# Altium PCB AT89S52多功能板.PcbDoc (part 5 of 5)
Units mm, origin at the board's own origin, x right, y up, seen from the top; angles counter-clockwise.
Board outline 152.4 x 101.6 mm, 2 copper layers (Top Layer, Bottom Layer); 140 components, 143 nets, 570 pads, 50 vias.
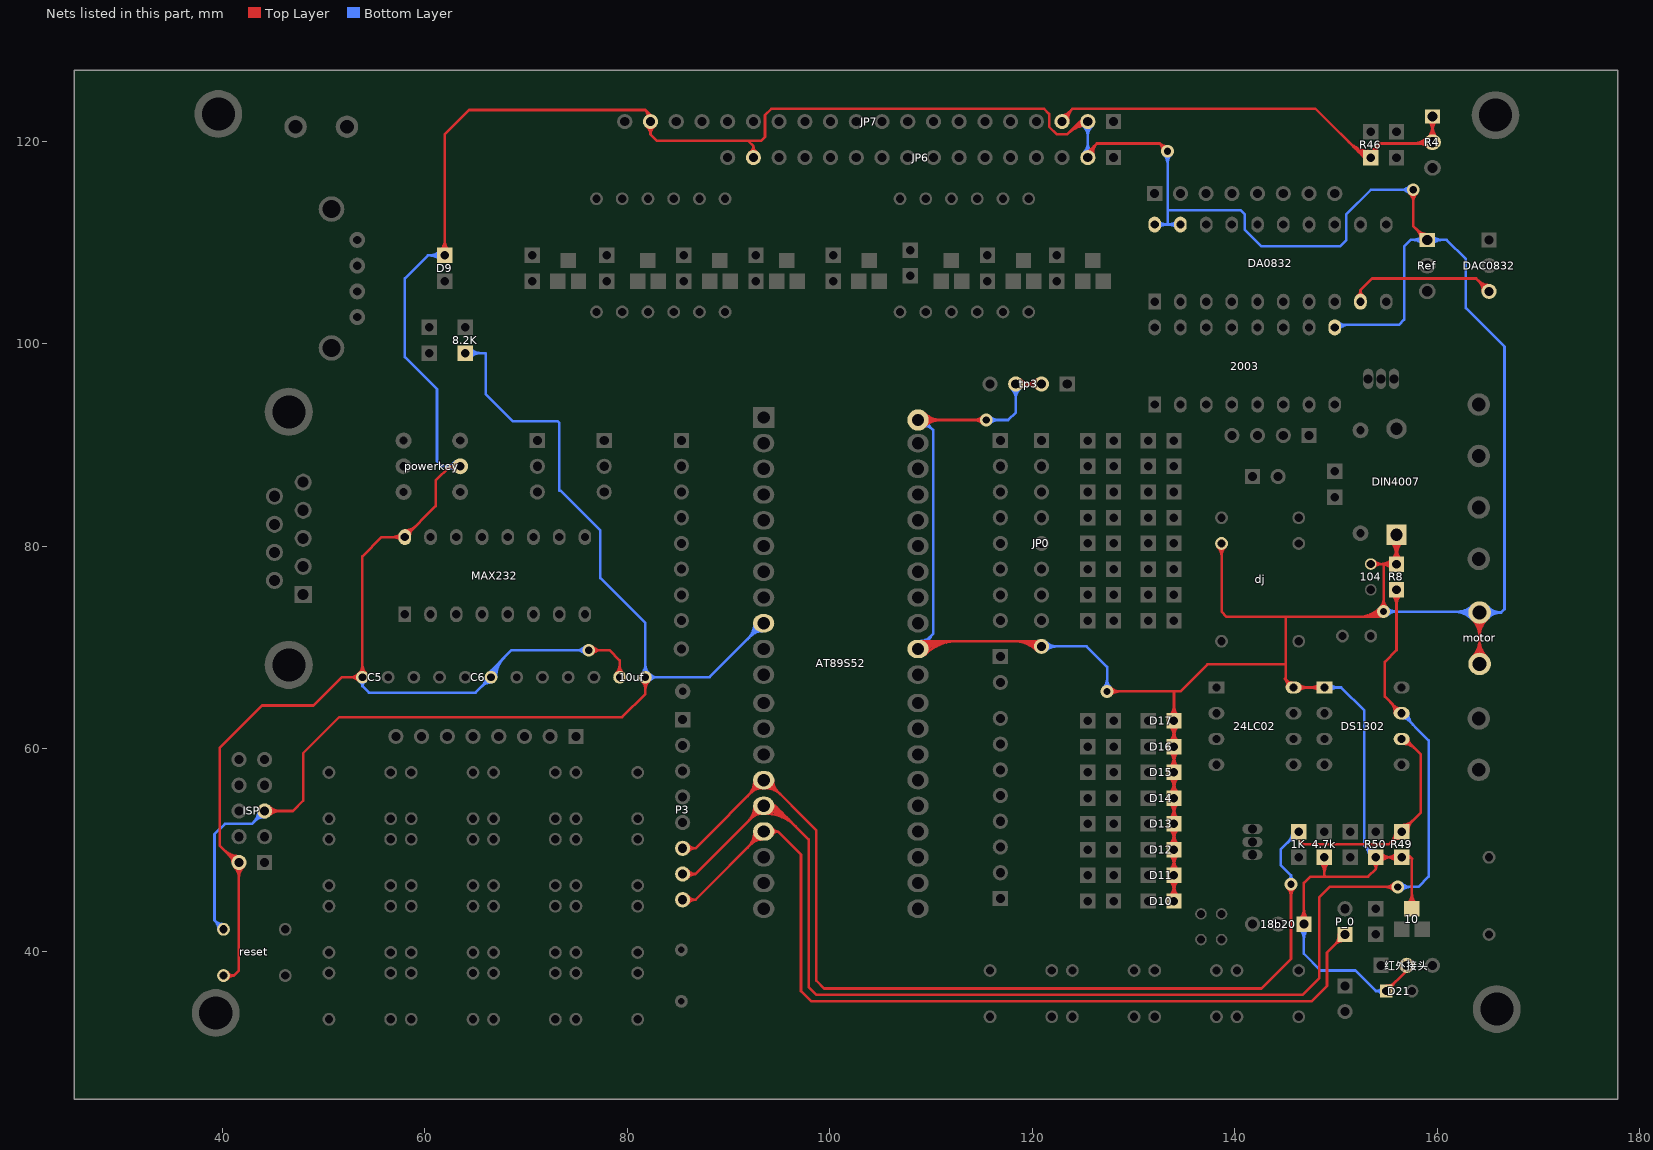
[diagram p5: the nets of this part, all layers, seen from the top]

## Via types
v1: diameter 1.27, hole 0.711, Top Layer to Bottom Layer, 50 vias

## Nets (pads, with @x,y where several pads share a name; then routed paths per layer and width w, separated by ;. In a path a pad name is that pad's centre, name@x,y a point inside that pad or via, vN(x,y) a via of type N, cw(c..) or ccw(c..) an arc to the next point about the centre after c; other vN are vias at no path point) (continued)
P35: 1K.1 AT89S52.15 DS1302.6 P3.6 R49.1 | length 149.4
  Top Layer w0.254: P3.6@85.471,50.165 86.741,50.165 ; P3.6@85.763,49.939 cw(c86.223,49.583) 86.223,50.165 cw(c86.223,50.747) P3.6@85.763,50.391 ; P3.6@85.964,49.784 cw(c86.741,49.182) 86.741,50.165 ; P3.6@85.964,50.546 ccw(c86.741,51.148) 86.741,50.165 ; 91.892,55.316 ccw(c90.312,56.896) AT89S52.15@92.547,56.896 ; 92.254,55.678 cw(c93.322,54.611) AT89S52.15@93.322,56.121 ; 92.326,55.75 ccw(c91.18,56.896) AT89S52.15@92.801,56.896 ; 92.688,56.112 cw(c93.322,55.478) AT89S52.15@93.322,56.375 ; 92.759,56.183 ccw(c92.047,56.896) AT89S52.15@93.055,56.896 ; AT89S52.15@93.622,56.121 cw(c93.622,53.998) 95.123,55.499 ; AT89S52.15@93.622,56.375 cw(c93.622,54.865) 94.69,55.932 ; AT89S52.15@94.143,56.896 ccw(c95.151,56.896) 94.439,56.183 ; AT89S52.15@94.397,56.896 ccw(c96.018,56.896) 94.872,55.75 ; v1@145.183,46.25 cw(c144.316,45.383) 145.542,45.383 cw(c146.768,45.383) v1@145.901,46.25 ; v1(145.542,46.609) 145.542,39.243 142.621,36.322 99.441,36.322 98.679,37.084 98.679,51.943 93.726,56.896 AT89S52.15@93.472,56.896 86.741,50.165 ; 1K.1@146.304,51.816 146.304,51.054 146.812,50.546 155.194,50.546 158.369,53.721 158.369,59.436 156.846,60.959 DS1302.6@156.46,60.959 ; R49.1@155.829,51.816 cw(c154.296,51.816) 155.38,50.732 cw(c156.464,49.648) R49.1@156.464,51.181 ; R49.1@156.083,51.816 cw(c155.163,51.816) 155.814,51.166 cw(c156.464,50.515) R49.1@156.464,51.435 ; R49.1@156.464,52.197 ccw(c156.464,53.117) 157.114,52.466 ccw(c157.765,51.816) R49.1@156.845,51.816 ; R49.1@156.464,52.451 ccw(c156.464,53.984) 157.548,52.9 ccw(c158.632,51.816) R49.1@157.099,51.816 ; DS1302.6@156.638,60.476 cw(c156.638,58.809) 157.817,59.988 ; DS1302.6@156.638,60.73 cw(c156.638,59.676) 157.383,60.422 ; DS1302.6@157.121,60.959 ccw(c157.783,60.959) 157.315,60.49
  Bottom Layer w0.254: v1(145.542,46.609) 145.542,47.498 ; 1K.1@145.669,51.816 cw(c144.136,51.816) 145.22,50.732 cw(c146.304,49.648) 1K.1@146.304,51.181 ; 1K.1@145.923,51.816 cw(c145.003,51.816) 145.654,51.166 cw(c146.304,50.515) 1K.1@146.304,51.435 ; 1K.1@146.304,51.816 144.526,50.038 144.526,48.514 145.542,47.498 ; 145.542,47.498 ccw(c146.066,47.498) 145.8,47.047 cw(c146.066,47.498) 145.542,47.498 ; 145.542,47.498 cw(c145.018,47.498) 145.284,47.047 ccw(c145.018,47.498) 145.542,47.498
P36: AT89S52.16 DS1302.7 P3.7 R8.1 | length 167.6
  Top Layer w0.254: P3.7@85.471,47.625 86.741,47.625 ; P3.7@85.763,47.399 cw(c86.223,47.043) 86.223,47.625 cw(c86.223,48.207) P3.7@85.763,47.851 ; P3.7@85.964,47.244 cw(c86.741,46.642) 86.741,47.625 ; P3.7@85.964,48.006 ccw(c86.741,48.608) 86.741,47.625 ; 91.892,52.776 ccw(c90.312,54.356) AT89S52.16@92.547,54.356 ; 92.254,53.138 cw(c93.322,52.071) AT89S52.16@93.322,53.581 ; 92.326,53.21 ccw(c91.18,54.356) AT89S52.16@92.801,54.356 ; 92.688,53.572 cw(c93.322,52.938) AT89S52.16@93.322,53.835 ; 92.759,53.643 ccw(c92.047,54.356) AT89S52.16@93.055,54.356 ; AT89S52.16@93.622,53.581 cw(c93.622,49.311) 96.641,52.33 ; AT89S52.16@93.622,53.835 cw(c93.622,50.179) 96.207,52.764 ; AT89S52.16@93.622,54.089 cw(c93.622,51.046) 95.774,53.197 ; AT89S52.16@93.622,54.343 cw(c93.622,51.913) 95.34,53.631 ; AT89S52.16@93.622,54.597 cw(c93.622,52.78) 94.906,54.065 ; 155.333,64.626 cw(c154.205,63.499) DS1302.7@155.8,63.499 ; R8.1@155.507,75.243 cw(c154.423,74.159) 155.956,74.159 cw(c157.489,74.159) R8.1@156.405,75.243 ; R8.1@155.687,75.423 cw(c155.036,74.772) 155.956,74.772 cw(c156.876,74.772) R8.1@156.225,75.423 ; v1@155.724,45.996 ccw(c154.857,45.129) 154.857,46.355 ccw(c154.857,47.581) v1@155.724,46.714 ; 155.762,64.197 ccw(c156.282,64.717) DS1302.7@156.282,63.982 ; 155.766,64.193 cw(c155.073,63.499) DS1302.7@156.054,63.499 ; DS1302.7@155.952,63.496 DS1302.7@155.952,63.499 ; R8.1@155.956,75.692 155.956,69.723 154.813,68.58 154.813,65.146 DS1302.7@156.46,63.499 ; v1(156.083,46.355) 149.352,46.355 148.336,45.339 148.336,37.338 146.685,35.687 98.679,35.687 97.917,36.449 97.917,51.054 94.615,54.356 ; 86.741,47.625 AT89S52.16@93.472,54.356 94.615,54.356 ; 94.615,54.356 ccw(c94.615,54.108) 94.374,54.168 cw(c94.615,54.108) 94.615,54.356 ; 94.615,54.356 cw(c94.615,54.604) 94.374,54.544 ccw(c94.615,54.604) 94.615,54.356
  Bottom Layer w0.254: v1(156.083,46.355) 158.115,46.355 159.131,47.371 159.131,60.828 DS1302.7@156.46,63.499 ; v1@156.442,45.996 cw(c157.309,45.129) 157.309,46.355 cw(c157.309,47.581) v1@156.442,46.714 ; DS1302.7@156.638,63.016 cw(c156.638,62.281) 157.158,62.801 ; DS1302.7@156.867,63.499 ccw(c157.848,63.499) 157.154,62.805 ; DS1302.7@157.121,63.499 ccw(c158.715,63.499) 157.588,62.372
P37: AT89S52.17 P3.8 P_0.1 | length 102.8
  Top Layer w0.254: P3.8@85.471,45.085 86.741,45.085 ; P3.8@85.763,44.859 cw(c86.223,44.503) 86.223,45.085 cw(c86.223,45.667) P3.8@85.763,45.311 ; P3.8@85.964,44.704 cw(c86.741,44.102) 86.741,45.085 ; P3.8@85.964,45.466 ccw(c86.741,46.068) 86.741,45.085 ; 91.892,50.236 ccw(c90.312,51.816) AT89S52.17@92.547,51.816 ; 92.254,50.598 cw(c93.322,49.531) AT89S52.17@93.322,51.041 ; 92.326,50.67 ccw(c91.18,51.816) AT89S52.17@92.801,51.816 ; 92.688,51.032 cw(c93.322,50.398) AT89S52.17@93.322,51.295 ; 92.759,51.103 ccw(c92.047,51.816) AT89S52.17@93.055,51.816 ; P_0.1@150.253,41.656 cw(c148.749,41.656) 149.812,40.592 cw(c150.876,39.529) P_0.1@150.876,41.033 ; P_0.1@150.507,41.656 cw(c149.616,41.656) 150.246,41.026 cw(c150.876,40.396) P_0.1@150.876,41.287 ; P_0.1@150.876,41.656 149.098,39.878 149.098,36.576 147.574,35.052 98.171,35.052 97.155,36.068 97.155,49.53 94.869,51.816 ; 86.741,45.085 AT89S52.17@93.472,51.816 94.869,51.816 ; 94.869,51.816 ccw(c94.869,51.201) 94.317,51.473 cw(c94.869,51.201) 94.869,51.816 ; 94.869,51.816 cw(c94.869,52.431) 94.317,52.159 ccw(c94.869,52.431) 94.869,51.816
RESET: 8.2K.1 10uf.2 AT89S52.9 ISP.5 reset.1 | length 144.2
  Top Layer w0.254: ISP.5@44.196,53.848 46.99,53.848 48.006,54.864 48.006,59.563 51.562,63.119 79.502,63.119 81.788,65.405 10uf.2@81.788,67.056 ; ISP.5@44.457,53.587 cw(c45.087,52.957) 45.087,53.848 cw(c45.087,54.739) ISP.5@44.457,54.109 ; ISP.5@44.637,53.407 cw(c45.7,52.344) 45.7,53.848 cw(c45.7,55.352) ISP.5@44.637,54.289 ; 10uf.2@81.429,66.697 cw(c80.562,65.83) 81.788,65.83 cw(c83.014,65.83) 10uf.2@82.147,66.697
  Bottom Layer w0.254: reset.1@39.624,42.164 ccw(c38.398,42.164) 39.265,43.031 ccw(c40.132,43.898) reset.1@40.132,42.672 ; reset.1@40.132,42.164 39.243,43.053 39.243,51.562 40.259,52.578 42.926,52.578 ISP.5@44.196,53.848 ; ISP.5@43.573,53.848 cw(c42.069,53.848) 43.132,52.784 cw(c44.196,51.721) ISP.5@44.196,53.225 ; ISP.5@43.827,53.848 cw(c42.936,53.848) 43.566,53.218 cw(c44.196,52.588) ISP.5@44.196,53.479 ; 8.2K.1@64.008,99.06 66.04,99.06 66.04,94.996 68.707,92.329 73.152,92.329 73.279,92.202 73.279,85.471 73.406,85.471 77.343,81.534 77.343,76.835 81.788,72.39 ; 8.2K.1@64.277,98.791 cw(c64.928,98.14) 64.928,99.06 cw(c64.928,99.98) 8.2K.1@64.277,99.329 ; 8.2K.1@64.457,98.611 cw(c65.541,97.527) 65.541,99.06 cw(c65.541,100.593) 8.2K.1@64.457,99.509 ; 10uf.2@81.429,67.415 ccw(c80.562,68.282) 81.788,68.282 ccw(c83.014,68.282) 82.147,67.415 ccw(c83.014,68.282) 83.014,67.056 ccw(c83.014,65.83) 10uf.2@82.147,66.697 ; 81.788,72.263 10uf.2@81.788,67.056 88.135,67.056 AT89S52.9@93.468,72.389 ; 91.888,70.809 ccw(c90.309,72.389) AT89S52.9@92.543,72.389 ; 92.251,71.171 cw(c93.318,70.104) AT89S52.9@93.318,71.614 ; 92.322,71.243 ccw(c91.176,72.389) AT89S52.9@92.797,72.389 ; 92.684,71.605 cw(c93.318,70.971) AT89S52.9@93.318,71.868 ; 92.756,71.676 ccw(c92.043,72.389) AT89S52.9@93.051,72.389
RFB: DA0832.9 DAC0832.3 | length 21.3
  Top Layer w0.254: DA0832.9@152.4,104.14 152.4,105.283 ; DAC0832.3@164.477,105.156 ccw(c162.973,105.156) 164.036,106.22 ccw(c165.1,107.283) DAC0832.3@165.1,105.779 ; DAC0832.3@164.731,105.156 ccw(c163.84,105.156) 164.47,105.786 ccw(c165.1,106.416) DAC0832.3@165.1,105.525 ; DAC0832.3@165.1,105.156 163.83,106.426 153.543,106.426 152.4,105.283 ; 152.4,105.283 ccw(c153.116,105.283) 152.694,104.705 cw(c153.116,105.283) 152.4,105.283 ; 152.4,105.283 cw(c151.684,105.283) 152.106,104.705 ccw(c151.684,105.283) 152.4,105.283
V0: JP7.3 R4.1 R4.3 R46.2 | length 69.5
  Top Layer w0.254: JP7.3@122.936,121.92 122.936,122.174 123.952,123.19 ; JP7.3@122.936,122.543 ccw(c122.936,123.434) 123.566,122.804 ; JP7.3@123.302,121.97 cw(c124.31,122.109) 123.59,122.828 ; JP7.3@123.553,122.005 cw(c124.946,122.196) 123.952,123.19 ; 151.248,119.897 ccw(c153.416,122.065) R46.2@153.416,118.999 ; 151.682,119.463 ccw(c153.416,121.198) R46.2@153.416,118.745 ; 152.115,119.03 ccw(c153.416,120.331) R46.2@153.416,118.491 ; 152.549,118.596 ccw(c153.416,119.463) R46.2@153.416,118.237 ; 157.609,119.761 ccw(c157.609,121.728) R4.3@158.999,120.337 ; R4.3@158.999,119.439 ccw(c158.222,118.662) 158.222,119.761 ccw(c158.222,121.114) R4.3@159.179,120.157 ; R4.3@159.063,120.337 ccw(c157.979,121.421) 159.512,121.421 ccw(c161.045,121.421) R4.3@159.961,120.337 ; R4.1@159.108,122.024 cw(c158.132,121.048) 159.512,121.048 cw(c160.892,121.048) R4.1@159.916,122.024 ; R4.3@159.243,120.157 ccw(c158.592,120.808) 159.512,120.808 ccw(c160.432,120.808) R4.3@159.781,120.157 ; R4.1@159.287,122.203 cw(c158.745,121.661) 159.512,121.661 cw(c160.279,121.661) R4.1@159.737,122.203 ; R4.1@159.512,122.428 R4.3@159.512,119.888 159.385,119.761 154.305,119.761 ; 123.952,123.19 147.955,123.19 152.781,118.364 R46.2@153.416,118.364 153.416,118.872 154.305,119.761 ; 154.305,119.761 ccw(c155.137,118.929) 154.019,118.562 cw(c155.137,118.929) 154.305,119.761 ; R46.2@153.537,118.404 cw(c154.257,118.64) 153.721,119.177 ccw(c154.257,118.64) R46.2@153.537,118.404 ; R46.2@153.778,118.483 cw(c154.697,118.785) 154.013,119.469 ccw(c154.697,118.785) R46.2@153.778,118.483
VCC: 4.7k.1 10.C 10uf.1 18b20.1 24LC02.8 104.1 2003.9 AT89S52.31 AT89S52.40 C5.1 C6.2 D9.1 D10.1 D11.1 D12.1 D13.1 D14.1 D15.1 D16.1 D17.1 D21.1 DA0832.19 DA0832.20 DIN4007.2 dj.5 DS1302.1 ISP.2 JP0.9 JP6.2 JP6.15 JP7.2 JP7.19 MAX232.16 motor.1 motor.2 powerkey.2 R8.2 R49.2 R50.2 Ref.1 reset.2 tp3.2 tp3.3 红外接头.2 | length 1013.9
  Top Layer w0.254: reset.2@40.132,37.592 41.148,37.592 ; 40.159,50.011 ccw(c41.656,51.508) ISP.2@41.656,49.391 ; reset.2@40.538,37.287 cw(c41.148,36.83) 41.148,37.592 ; reset.2@40.538,37.897 ccw(c41.148,38.354) 41.148,37.592 ; 40.592,49.578 ccw(c41.656,50.641) ISP.2@41.656,49.137 ; 40.772,49.398 cw(c40.142,48.768) ISP.2@41.033,48.768 ; ISP.2@41.215,48.327 cw(c40.152,47.264) 41.656,47.264 cw(c43.16,47.264) ISP.2@42.097,48.327 ; ISP.2@41.395,48.507 cw(c40.765,47.877) 41.656,47.877 cw(c42.547,47.877) ISP.2@41.917,48.507 ; C5.1@53.489,66.697 ccw(c52.622,65.83) 52.622,67.056 ccw(c52.622,68.282) 53.489,67.415 ccw(c52.622,68.282) 53.848,68.282 ccw(c55.074,68.282) C5.1@54.207,67.415 ; MAX232.16@57.688,80.543 ccw(c56.838,79.693) 56.838,80.895 ccw(c56.838,82.097) MAX232.16@57.688,81.247 ; MAX232.16@58.04,81.302 ccw(c58.04,82.271) 58.726,81.586 ; MAX232.16@58.04,81.556 ccw(c58.04,83.138) 59.159,82.019 ; MAX232.16@58.538,81.058 cw(c59.36,81.058) 58.779,81.639 ; D9.1@61.527,109.161 ccw(c60.443,110.245) 61.976,110.245 ccw(c63.509,110.245) D9.1@62.425,109.161 ; D9.1@61.707,108.981 ccw(c61.056,109.632) 61.976,109.632 ccw(c62.896,109.632) D9.1@62.245,108.981 ; D9.1@61.976,108.712 61.976,120.65 64.389,123.063 81.788,123.063 82.296,122.555 82.296,120.65 ; powerkey.2@63.5,87.884 62.484,87.884 ; v1(76.2,69.723) 78.232,69.723 79.248,68.707 10uf.1@79.248,67.056 ; v1@76.559,69.364 cw(c77.426,68.497) 77.426,69.723 cw(c77.426,70.949) v1@76.559,70.082 ; 10uf.1@78.889,67.415 ccw(c78.022,68.282) 79.248,68.282 ccw(c80.474,68.282) 10uf.1@79.607,67.415 ; 81.741,123.11 cw(c81.056,122.424) JP7.19@81.954,122.059 ; JP7.19@81.915,121.427 cw(c81.313,120.65) 82.296,120.65 ; 82.012,122.839 cw(c81.441,122.267) JP7.19@82.189,121.963 ; JP7.19@82.07,121.628 cw(c81.714,121.168) 82.296,121.168 cw(c82.878,121.168) JP7.19@82.522,121.628 ; JP7.19@82.677,121.427 ccw(c83.279,120.65) 82.296,120.65 ; 91.948,120.015 92.456,119.507 ; JP6.15@92.456,118.364 92.456,119.507 ; AT89S52.31@108.508,70.199 cw(c109.506,69.201) 109.506,70.612 ; AT89S52.31@108.688,70.019 cw(c110.119,68.588) 110.119,70.612 ; AT89S52.31@108.708,69.849 108.708,70.1 109.22,70.612 120.396,70.612 JP0.9@120.904,70.104 ; AT89S52.40@108.712,92.456 v1(115.443,92.456) ; AT89S52.31@108.868,69.84 cw(c110.733,67.975) 110.733,70.612 ; AT89S52.31@109.047,69.66 cw(c111.346,67.361) 111.346,70.612 ; AT89S52.40@109.187,91.981 cw(c110.333,90.835) 110.333,92.456 cw(c110.333,94.077) AT89S52.40@109.187,92.931 ; AT89S52.31@109.227,69.48 cw(c111.959,66.748) 111.959,70.612 ; AT89S52.40@109.366,91.802 cw(c110.946,90.222) 110.946,92.456 cw(c110.946,94.69) AT89S52.40@109.366,93.11 ; AT89S52.31@109.406,69.301 cw(c112.572,66.135) 112.572,70.612 ; v1@115.084,92.097 ccw(c114.217,91.23) 114.217,92.456 ccw(c114.217,93.682) v1@115.084,92.815 ; 118.174,70.612 cw(c118.174,67.374) JP0.9@120.463,69.663 ; tp3.3@118.364,96.012 tp3.2@120.904,96.012 ; tp3.3@118.625,95.751 cw(c119.255,95.121) 119.255,96.012 cw(c119.255,96.903) tp3.3@118.625,96.273 ; 118.787,70.612 cw(c118.787,67.987) JP0.9@120.643,69.843 ; tp3.3@118.805,95.571 cw(c119.868,94.508) 119.868,96.012 cw(c119.868,97.516) tp3.3@118.805,96.453 ; 119.4,70.612 cw(c119.4,68.6) JP0.9@120.823,70.023 ; 120.013,70.612 cw(c120.013,69.213) JP0.9@121.002,70.202 ; tp3.2@120.463,95.571 ccw(c119.4,94.508) 119.4,96.012 ccw(c119.4,97.516) tp3.2@120.463,96.453 ; tp3.2@120.643,95.751 ccw(c120.013,95.121) 120.013,96.012 ccw(c120.013,96.903) tp3.2@120.643,96.273 ; 123.545,120.751 cw(c125.476,118.821) JP7.2@125.476,121.551 ; 123.979,121.185 cw(c125.476,119.688) JP7.2@125.476,121.805 ; 124.412,121.618 cw(c125.476,120.555) JP7.2@125.476,122.059 ; JP6.2@125.476,118.364 125.476,118.872 126.365,119.761 ; JP7.2@125.476,121.92 124.714,121.92 ; JP6.2@125.586,118.399 cw(c126.314,118.629) 125.774,119.17 ; JP6.2@125.828,118.475 cw(c126.763,118.772) 126.069,119.465 ; JP6.2@126.07,118.552 cw(c127.212,118.914) 126.365,119.761 ; v1(127.381,65.659) 134.62,65.659 137.287,68.326 145.034,68.326 ; v1@127.74,65.3 cw(c128.607,64.433) 128.607,65.659 cw(c128.607,66.885) v1@127.74,66.018 ; v1@132.844,119.048 ccw(c131.959,119.132) 132.588,119.761 ; v1@133.301,119.505 cw(c133.217,120.39) 132.588,119.761 ; v1(133.35,118.999) 132.588,119.761 ; D15.1@133.536,58.107 ccw(c132.452,59.191) 133.985,59.191 ccw(c135.518,59.191) D15.1@134.434,58.107 ; D16.1@133.536,59.749 cw(c132.452,58.665) 133.985,58.665 cw(c135.518,58.665) D16.1@134.434,59.749 ; D16.1@133.536,60.647 ccw(c132.452,61.731) 133.985,61.731 ccw(c135.518,61.731) D16.1@134.434,60.647 ; D17.1@133.536,62.289 cw(c132.452,61.205) 133.985,61.205 cw(c135.518,61.205) D17.1@134.434,62.289 ; D17.1@133.536,63.187 ccw(c132.452,64.271) 133.985,64.271 ccw(c135.518,64.271) D17.1@134.434,63.187 ; D15.1@133.716,57.927 ccw(c133.065,58.578) 133.985,58.578 ccw(c134.905,58.578) D15.1@134.254,57.927 ; D16.1@133.716,59.929 cw(c133.065,59.278) 133.985,59.278 cw(c134.905,59.278) D16.1@134.254,59.929 ; D16.1@133.716,60.467 ccw(c133.065,61.118) 133.985,61.118 ccw(c134.905,61.118) D16.1@134.254,60.467 ; D17.1@133.716,62.469 cw(c133.065,61.818) 133.985,61.818 cw(c134.905,61.818) D17.1@134.254,62.469 ; D17.1@133.716,63.007 ccw(c133.065,63.658) 133.985,63.658 ccw(c134.905,63.658) D17.1@134.254,63.007 ; D11.1@133.985,47.498 D10.1@133.985,44.958 ; D12.1@133.985,50.038 D10.1@133.985,44.958 ; D13.1@133.985,52.578 D10.1@133.985,44.958 ; D14.1@133.985,55.118 D10.1@133.985,44.958 ; D15.1@133.985,57.658 D10.1@133.985,44.958 ; 133.985,65.659 D16.1@133.985,60.198 D10.1@133.985,44.958 ; dj.5@138.325,79.905 cw(c137.458,79.038) 138.684,79.038 cw(c139.91,79.038) dj.5@139.043,79.905 ; dj.5@138.684,80.264 138.684,73.533 139.192,73.025 154.178,73.025 ; 144.945,66.886 cw(c144.403,66.344) 24LC02.8@145.146,66.157 ; 145.034,73.025 145.034,66.797 24LC02.8@145.792,66.039 DS1302.1@148.84,66.039 ; 145.094,66.737 ccw(c145.614,67.257) 24LC02.8@145.614,66.522 ; 145.262,66.57 cw(c144.909,66.217) 24LC02.8@145.393,66.095 ; 24LC02.8@146.311,65.698 cw(c147.135,64.874) 147.135,66.039 cw(c147.135,67.204) 24LC02.8@146.311,66.38 ; 18b20.1@146.371,43.113 ccw(c145.308,44.176) 146.812,44.176 ccw(c148.316,44.176) 18b20.1@147.253,43.113 ; 18b20.1@146.551,42.933 ccw(c145.921,43.563) 146.812,43.563 ccw(c147.703,43.563) 18b20.1@147.073,42.933 ; 18b20.1@146.939,42.672 18b20.1@146.812,42.672 146.812,46.736 147.447,47.371 153.162,47.371 153.924,48.133 ; DS1302.1@148.321,65.698 ccw(c147.497,64.874) 147.497,66.039 ccw(c147.497,67.204) DS1302.1@148.321,66.38 ; 4.7k.1@148.395,48.827 cw(c147.311,47.743) 148.844,47.743 cw(c150.377,47.743) 4.7k.1@149.293,48.827 ; 4.7k.1@148.575,49.007 cw(c147.924,48.356) 148.844,48.356 cw(c149.764,48.356) 4.7k.1@149.113,49.007 ; 4.7k.1@148.844,49.276 148.844,47.498 148.971,47.371 ; 152.233,73.025 ccw(c152.233,75.986) 154.327,73.892 ccw(c153.46,74.759) 154.686,74.759 ccw(c155.912,74.759) v1@155.045,73.892 ; 152.846,73.025 ccw(c152.846,75.373) v1@154.506,73.713 ; 104.1@153.416,78.232 R8.2@155.956,78.232 DIN4007.2@155.956,81.13 ; 153.46,73.025 ccw(c153.46,74.759) v1(154.686,73.533) ; R50.2@153.589,48.737 cw(c153.213,48.133) 153.924,48.133 ; 104.1@153.73,77.918 cw(c154.489,77.159) 154.489,78.232 cw(c154.489,79.305) 104.1@153.73,78.546 ; 154.073,73.025 ccw(c154.073,74.146) v1@154.866,73.353 ; R50.2@154.193,49.007 cw(c154.844,48.356) 154.844,49.276 cw(c154.844,50.196) R50.2@154.193,49.545 ; R50.2@154.259,48.737 ccw(c154.635,48.133) 153.924,48.133 ; R50.2@154.373,48.827 cw(c155.457,47.743) 155.457,49.276 cw(c155.457,50.809) R50.2@154.373,49.725 ; 154.686,78.232 v1(154.686,73.533) ; D21.1@154.94,36.068 红外接头.2@156.972,38.1 ; D21.1@154.94,36.576 ccw(c154.94,37.802) 155.807,36.935 ccw(c156.674,36.068) D21.1@155.448,36.068 ; DIN4007.2@155.339,80.513 cw(c153.848,79.022) 155.956,79.022 cw(c158.064,79.022) DIN4007.2@156.573,80.513 ; R8.2@155.507,77.783 ccw(c154.423,76.699) 154.423,78.232 ccw(c154.423,79.765) 155.507,78.681 ccw(c154.423,79.765) 155.956,79.765 ccw(c157.489,79.765) R8.2@156.405,78.681 ; DIN4007.2@155.518,80.692 cw(c154.462,79.636) 155.956,79.636 cw(c157.45,79.636) DIN4007.2@156.394,80.692 ; R8.2@155.687,77.963 ccw(c155.036,77.312) 155.036,78.232 ccw(c155.036,79.152) 155.687,78.501 ccw(c155.036,79.152) 155.956,79.152 ccw(c156.876,79.152) R8.2@156.225,78.501 ; R49.2@156.015,48.827 ccw(c154.931,47.743) 154.931,49.276 ccw(c154.931,50.809) R49.2@156.015,49.725 ; R49.2@156.195,49.007 ccw(c155.544,48.356) 155.544,49.276 ccw(c155.544,50.196) R49.2@156.195,49.545 ; R49.2@156.386,49.377 cw(c156.815,48.821) 157.312,49.317 ; R49.2@156.542,49.175 cw(c156.993,48.59) 157.516,49.113 ; 10.C@157.031,44.645 ccw(c155.947,45.729) 157.48,45.729 ccw(c159.013,45.729) 10.C@157.929,44.645 ; 10.C@157.211,44.465 ccw(c156.56,45.116) 157.48,45.116 ccw(c158.4,45.116) 10.C@157.749,44.465 ; v1@157.248,114.83 cw(c156.381,113.963) 157.607,113.963 cw(c158.833,113.963) v1@157.966,114.83 ; 10.C@157.48,44.196 157.48,49.149 157.353,49.276 ; v1(157.607,115.189) 157.607,111.633 Ref.1@159.004,110.236 ; 157.92,111.32 cw(c156.836,110.236) Ref.1@158.369,110.236 ; 158.073,111.167 ccw(c158.94,112.034) Ref.1@158.94,110.807 ; Ref.1@158.354,110.886 cw(c157.703,110.236) Ref.1@158.623,110.236 ; motor.1@163.466,69.062 ccw(c161.784,70.744) 164.162,70.744 ccw(c166.54,70.744) motor.1@164.859,69.062 ; motor.2@163.466,72.749 cw(c161.784,71.068) 164.162,71.068 cw(c166.54,71.068) motor.2@164.859,72.749 ; motor.1@163.645,68.883 ccw(c162.398,70.131) 164.162,70.131 ccw(c165.927,70.131) motor.1@164.679,68.883 ; motor.2@163.645,72.929 cw(c162.398,71.681) 164.162,71.681 cw(c165.927,71.681) motor.2@164.679,72.929 ; motor.1@163.825,68.703 ccw(c163.011,69.517) 164.162,69.517 ccw(c165.314,69.517) motor.1@164.5,68.703 ; motor.2@163.825,73.109 cw(c163.011,72.294) 164.162,72.294 cw(c165.314,72.294) motor.2@164.5,73.109 ; motor.1@164.162,68.366 motor.2@164.162,73.446 ; 41.148,37.592 41.656,38.1 ISP.2@41.656,48.768 41.402,48.768 39.751,50.419 39.751,60.071 43.942,64.262 49.022,64.262 51.816,67.056 C5.1@53.848,67.056 53.848,78.994 55.749,80.895 MAX232.16@58.04,80.895 58.04,80.9 61.087,83.947 61.087,86.487 62.484,87.884 ; 62.484,87.884 ccw(c62.484,88.335) 62.896,88.152 cw(c62.484,88.335) 62.484,87.884 ; 62.484,87.884 cw(c62.484,87.433) 62.896,87.616 ccw(c62.484,87.433) 62.484,87.884 ; 82.296,120.65 82.931,120.015 93.218,120.015 93.599,120.396 93.599,122.555 94.234,123.19 121.158,123.19 121.666,122.682 121.666,121.412 122.428,120.65 123.444,120.65 124.714,121.92 ; 92.456,119.507 ccw(c93.193,119.507) 92.794,118.888 cw(c93.193,119.507) 92.456,119.507 ; 92.456,119.507 cw(c91.719,119.507) 92.118,118.888 ccw(c91.719,119.507) 92.456,119.507 ; 124.714,121.92 ccw(c124.714,122.074) 124.865,122.044 cw(c124.714,122.074) 124.714,121.92 ; 124.714,121.92 cw(c124.714,121.766) 124.865,121.796 ccw(c124.714,121.766) 124.714,121.92 ; 126.365,119.761 132.588,119.761 ; D10.1@133.536,45.407 ccw(c132.452,46.491) 133.985,46.491 ; D10.1@133.536,45.407 ccw(c132.452,46.491) 133.985,46.491 ; D10.1@133.536,45.407 ccw(c132.452,46.491) 133.985,46.491 ; D10.1@133.536,45.407 ccw(c132.452,46.491) 133.985,46.491 ; D10.1@133.536,45.407 ccw(c132.452,46.491) 133.985,46.491 ; D10.1@133.536,45.407 ccw(c132.452,46.491) 133.985,46.491 ; D11.1@133.536,47.049 cw(c132.452,45.965) 133.985,45.965 ; D11.1@133.536,47.049 cw(c132.452,45.965) 133.985,45.965 ; D11.1@133.536,47.049 cw(c132.452,45.965) 133.985,45.965 ; D11.1@133.536,47.049 cw(c132.452,45.965) 133.985,45.965 ; D11.1@133.536,47.049 cw(c132.452,45.965) 133.985,45.965 ; D11.1@133.536,47.049 cw(c132.452,45.965) 133.985,45.965 ; D11.1@133.536,47.947 ccw(c132.452,49.031) 133.985,49.031 ; D11.1@133.536,47.947 ccw(c132.452,49.031) 133.985,49.031 ; D11.1@133.536,47.947 ccw(c132.452,49.031) 133.985,49.031 ; D11.1@133.536,47.947 ccw(c132.452,49.031) 133.985,49.031 ; D11.1@133.536,47.947 ccw(c132.452,49.031) 133.985,49.031 ; D12.1@133.536,49.589 cw(c132.452,48.505) 133.985,48.505 ; D12.1@133.536,49.589 cw(c132.452,48.505) 133.985,48.505 ; D12.1@133.536,49.589 cw(c132.452,48.505) 133.985,48.505 ; D12.1@133.536,49.589 cw(c132.452,48.505) 133.985,48.505 ; D12.1@133.536,49.589 cw(c132.452,48.505) 133.985,48.505 ; D12.1@133.536,50.487 ccw(c132.452,51.571) 133.985,51.571 ; D12.1@133.536,50.487 ccw(c132.452,51.571) 133.985,51.571 ; D12.1@133.536,50.487 ccw(c132.452,51.571) 133.985,51.571 ; D12.1@133.536,50.487 ccw(c132.452,51.571) 133.985,51.571 ; D13.1@133.536,52.129 cw(c132.452,51.045) 133.985,51.045 ; D13.1@133.536,52.129 cw(c132.452,51.045) 133.985,51.045 ; D13.1@133.536,52.129 cw(c132.452,51.045) 133.985,51.045 ; D13.1@133.536,52.129 cw(c132.452,51.045) 133.985,51.045 ; D13.1@133.536,53.027 ccw(c132.452,54.111) 133.985,54.111 ; D13.1@133.536,53.027 ccw(c132.452,54.111) 133.985,54.111 ; D13.1@133.536,53.027 ccw(c132.452,54.111) 133.985,54.111 ; D14.1@133.536,54.669 cw(c132.452,53.585) 133.985,53.585 ; D14.1@133.536,54.669 cw(c132.452,53.585) 133.985,53.585 ; D14.1@133.536,54.669 cw(c132.452,53.585) 133.985,53.585 ; D10.1@133.716,45.227 ccw(c133.065,45.878) 133.985,45.878 ; D10.1@133.716,45.227 ccw(c133.065,45.878) 133.985,45.878 ; D10.1@133.716,45.227 ccw(c133.065,45.878) 133.985,45.878 ; D10.1@133.716,45.227 ccw(c133.065,45.878) 133.985,45.878 ; D10.1@133.716,45.227 ccw(c133.065,45.878) 133.985,45.878 ; D10.1@133.716,45.227 ccw(c133.065,45.878) 133.985,45.878 ; D11.1@133.716,47.229 cw(c133.065,46.578) 133.985,46.578 ; D11.1@133.716,47.229 cw(c133.065,46.578) 133.985,46.578 ; D11.1@133.716,47.229 cw(c133.065,46.578) 133.985,46.578 ; D11.1@133.716,47.229 cw(c133.065,46.578) 133.985,46.578 ; D11.1@133.716,47.229 cw(c133.065,46.578) 133.985,46.578 ; D11.1@133.716,47.229 cw(c133.065,46.578) 133.985,46.578 ; D11.1@133.716,47.767 ccw(c133.065,48.418) 133.985,48.418 ; D11.1@133.716,47.767 ccw(c133.065,48.418) 133.985,48.418 ; D11.1@133.716,47.767 ccw(c133.065,48.418) 133.985,48.418 ; D11.1@133.716,47.767 ccw(c133.065,48.418) 133.985,48.418 ; D11.1@133.716,47.767 ccw(c133.065,48.418) 133.985,48.418 ; D12.1@133.716,49.769 cw(c133.065,49.118) 133.985,49.118 ; D12.1@133.716,49.769 cw(c133.065,49.118) 133.985,49.118 ; D12.1@133.716,49.769 cw(c133.065,49.118) 133.985,49.118 ; D12.1@133.716,49.769 cw(c133.065,49.118) 133.985,49.118 ; D12.1@133.716,49.769 cw(c133.065,49.118) 133.985,49.118 ; D12.1@133.716,50.307 ccw(c133.065,50.958) 133.985,50.958 ; D12.1@133.716,50.307 ccw(c133.065,50.958) 133.985,50.958 ; D12.1@133.716,50.307 ccw(c133.065,50.958) 133.985,50.958 ; D12.1@133.716,50.307 ccw(c133.065,50.958) 133.985,50.958 ; D13.1@133.716,52.309 cw(c133.065,51.658) 133.985,51.658 ; D13.1@133.716,52.309 cw(c133.065,51.658) 133.985,51.658 ; D13.1@133.716,52.309 cw(c133.065,51.658) 133.985,51.658 ; D13.1@133.716,52.309 cw(c133.065,51.658) 133.985,51.658 ; D13.1@133.716,52.847 ccw(c133.065,53.498) 133.985,53.498 ; D13.1@133.716,52.847 ccw(c133.065,53.498) 133.985,53.498 ; D13.1@133.716,52.847 ccw(c133.065,53.498) 133.985,53.498 ; D14.1@133.716,54.849 cw(c133.065,54.198) 133.985,54.198 ; D14.1@133.716,54.849 cw(c133.065,54.198) 133.985,54.198 ; D14.1@133.716,54.849 cw(c133.065,54.198) 133.985,54.198 ; 133.985,45.878 ccw(c134.905,45.878) D10.1@134.254,45.227 ; 133.985,45.878 ccw(c134.905,45.878) D10.1@134.254,45.227 ; 133.985,45.878 ccw(c134.905,45.878) D10.1@134.254,45.227 ; 133.985,45.878 ccw(c134.905,45.878) D10.1@134.254,45.227 ; 133.985,45.878 ccw(c134.905,45.878) D10.1@134.254,45.227 ; 133.985,45.878 ccw(c134.905,45.878) D10.1@134.254,45.227 ; 133.985,45.965 cw(c135.518,45.965) D11.1@134.434,47.049 ; 133.985,45.965 cw(c135.518,45.965) D11.1@134.434,47.049 ; 133.985,45.965 cw(c135.518,45.965) D11.1@134.434,47.049 ; 133.985,45.965 cw(c135.518,45.965) D11.1@134.434,47.049 ; 133.985,45.965 cw(c135.518,45.965) D11.1@134.434,47.049 ; 133.985,45.965 cw(c135.518,45.965) D11.1@134.434,47.049 ; 133.985,46.491 ccw(c135.518,46.491) D10.1@134.434,45.407 ; 133.985,46.491 ccw(c135.518,46.491) D10.1@134.434,45.407 ; 133.985,46.491 ccw(c135.518,46.491) D10.1@134.434,45.407 ; 133.985,46.491 ccw(c135.518,46.491) D10.1@134.434,45.407 ; 133.985,46.491 ccw(c135.518,46.491) D10.1@134.434,45.407 ; 133.985,46.491 ccw(c135.518,46.491) D10.1@134.434,45.407 ; 133.985,46.578 cw(c134.905,46.578) D11.1@134.254,47.229 ; 133.985,46.578 cw(c134.905,46.578) D11.1@134.254,47.229 ; 133.985,46.578 cw(c134.905,46.578) D11.1@134.254,47.229 ; 133.985,46.578 cw(c134.905,46.578) D11.1@134.254,47.229 ; 133.985,46.578 cw(c134.905,46.578) D11.1@134.254,47.229 ; 133.985,46.578 cw(c134.905,46.578) D11.1@134.254,47.229 ; 133.985,48.418 ccw(c134.905,48.418) D11.1@134.254,47.767 ; 133.985,48.418 ccw(c134.905,48.418) D11.1@134.254,47.767 ; 133.985,48.418 ccw(c134.905,48.418) D11.1@134.254,47.767 ; 133.985,48.418 ccw(c134.905,48.418) D11.1@134.254,47.767 ; 133.985,48.418 ccw(c134.905,48.418) D11.1@134.254,47.767 ; 133.985,48.505 cw(c135.518,48.505) D12.1@134.434,49.589 ; 133.985,48.505 cw(c135.518,48.505) D12.1@134.434,49.589 ; 133.985,48.505 cw(c135.518,48.505) D12.1@134.434,49.589 ; 133.985,48.505 cw(c135.518,48.505) D12.1@134.434,49.589 ; 133.985,48.505 cw(c135.518,48.505) D12.1@134.434,49.589 ; 133.985,49.031 ccw(c135.518,49.031) D11.1@134.434,47.947 ; 133.985,49.031 ccw(c135.518,49.031) D11.1@134.434,47.947 ; 133.985,49.031 ccw(c135.518,49.031) D11.1@134.434,47.947 ; 133.985,49.031 ccw(c135.518,49.031) D11.1@134.434,47.947 ; 133.985,49.031 ccw(c135.518,49.031) D11.1@134.434,47.947 ; 133.985,49.118 cw(c134.905,49.118) D12.1@134.254,49.769 ; 133.985,49.118 cw(c134.905,49.118) D12.1@134.254,49.769 ; 133.985,49.118 cw(c134.905,49.118) D12.1@134.254,49.769 ; 133.985,49.118 cw(c134.905,49.118) D12.1@134.254,49.769 ; 133.985,49.118 cw(c134.905,49.118) D12.1@134.254,49.769 ; 133.985,50.958 ccw(c134.905,50.958) D12.1@134.254,50.307 ; 133.985,50.958 ccw(c134.905,50.958) D12.1@134.254,50.307 ; 133.985,50.958 ccw(c134.905,50.958) D12.1@134.254,50.307 ; 133.985,50.958 ccw(c134.905,50.958) D12.1@134.254,50.307 ; 133.985,51.045 cw(c135.518,51.045) D13.1@134.434,52.129 ; 133.985,51.045 cw(c135.518,51.045) D13.1@134.434,52.129 ; 133.985,51.045 cw(c135.518,51.045) D13.1@134.434,52.129 ; 133.985,51.045 cw(c135.518,51.045) D13.1@134.434,52.129 ; 133.985,51.571 ccw(c135.518,51.571) D12.1@134.434,50.487 ; 133.985,51.571 ccw(c135.518,51.571) D12.1@134.434,50.487 ; 133.985,51.571 ccw(c135.518,51.571) D12.1@134.434,50.487 ; 133.985,51.571 ccw(c135.518,51.571) D12.1@134.434,50.487 ; 133.985,51.658 cw(c134.905,51.658) D13.1@134.254,52.309 ; 133.985,51.658 cw(c134.905,51.658) D13.1@134.254,52.309 ; 133.985,51.658 cw(c134.905,51.658) D13.1@134.254,52.309 ; 133.985,51.658 cw(c134.905,51.658) D13.1@134.254,52.309 ; 133.985,53.498 ccw(c134.905,53.498) D13.1@134.254,52.847 ; 133.985,53.498 ccw(c134.905,53.498) D13.1@134.254,52.847 ; 133.985,53.498 ccw(c134.905,53.498) D13.1@134.254,52.847 ; 133.985,53.585 cw(c135.518,53.585) D14.1@134.434,54.669 ; 133.985,53.585 cw(c135.518,53.585) D14.1@134.434,54.669 ; 133.985,53.585 cw(c135.518,53.585) D14.1@134.434,54.669 ; 133.985,54.111 ccw(c135.518,54.111) D13.1@134.434,53.027 ; 133.985,54.111 ccw(c135.518,54.111) D13.1@134.434,53.027 ; 133.985,54.111 ccw(c135.518,54.111) D13.1@134.434,53.027 ; 133.985,54.198 cw(c134.905,54.198) D14.1@134.254,54.849 ; 133.985,54.198 cw(c134.905,54.198) D14.1@134.254,54.849 ; 133.985,54.198 cw(c134.905,54.198) D14.1@134.254,54.849 ; 133.985,56.038 ccw(c134.905,56.038) 134.254,55.387 cw(c134.905,56.038) 133.985,56.038 ; 133.985,56.038 cw(c133.065,56.038) 133.716,55.387 ccw(c133.065,56.038) 133.985,56.038 ; 133.985,56.125 ccw(c132.452,56.125) 133.536,57.209 cw(c132.452,56.125) 133.985,56.125 ; 133.985,56.125 cw(c135.518,56.125) 134.434,57.209 ccw(c135.518,56.125) 133.985,56.125 ; 133.985,56.651 ccw(c135.518,56.651) 134.434,55.567 cw(c135.518,56.651) 133.985,56.651 ; 133.985,56.651 cw(c132.452,56.651) 133.536,55.567 ccw(c132.452,56.651) 133.985,56.651 ; 133.985,56.738 ccw(c133.065,56.738) 133.716,57.389 cw(c133.065,56.738) 133.985,56.738 ; 133.985,56.738 cw(c134.905,56.738) 134.254,57.389 ccw(c134.905,56.738) 133.985,56.738 ; 153.924,48.133 R50.2@153.924,49.276 157.353,49.276 ; 154.178,73.025 ccw(c153.998,73.205) 154.228,73.314 cw(c153.998,73.205) 154.178,73.025 ; 154.178,73.025 cw(c154.358,72.845) 154.467,73.075 ccw(c154.358,72.845) 154.178,73.025 ; 154.178,73.025 v1(154.686,73.533) ; 157.353,49.276 ccw(c157.353,48.971) 157.065,49.07 cw(c157.353,48.971) 157.353,49.276 ; 157.353,49.276 cw(c157.353,49.581) 157.065,49.482 ccw(c157.353,49.581) 157.353,49.276
  Bottom Layer w0.254: C5.1@53.848,67.056 53.848,66.167 ; D9.1@61.527,108.263 ccw(c60.443,107.179) 60.443,108.712 ccw(c60.443,110.245) D9.1@61.527,109.161 ; D9.1@61.707,108.443 ccw(c61.056,107.792) 61.056,108.712 ccw(c61.056,109.632) D9.1@61.707,108.981 ; D9.1@61.976,108.712 60.325,108.712 58.039,106.426 58.039,98.679 61.214,95.504 61.214,88.392 61.722,87.884 powerkey.2@63.5,87.884 ; powerkey.2@63.033,87.417 ccw(c61.906,86.29) 61.906,87.884 ccw(c61.906,89.478) powerkey.2@63.033,88.351 ; powerkey.2@63.213,87.597 ccw(c62.519,86.903) 62.519,87.884 ccw(c62.519,88.865) powerkey.2@63.213,88.171 ; C6.2@66.04,67.056 cw(c64.814,67.056) 65.681,66.189 cw(c66.548,65.322) C6.2@66.548,66.548 ; C6.2@66.294,67.056 cw(c67.214,67.056) 66.563,67.706 ; C6.2@66.802,67.056 cw(c68.948,67.056) 67.431,68.574 ; 66.997,68.14 ccw(c68.081,67.056) C6.2@66.548,67.056 ; C6.2@67.056,67.056 cw(c69.815,67.056) 67.864,69.007 ; v1@75.841,69.364 ccw(c74.974,68.497) 74.974,69.723 ccw(c74.974,70.949) v1@75.841,70.082 ; v1(76.2,69.723) 68.58,69.723 66.548,67.691 C6.2@66.548,67.056 ; AT89S52.31@108.708,69.849 110.236,71.377 ; AT89S52.40@108.712,92.456 109.22,92.456 110.236,91.44 110.236,71.377 ; AT89S52.40@108.831,92.056 cw(c109.135,91.036) 109.887,91.789 ; AT89S52.31@108.858,70.37 ccw(c108.858,71.267) 109.492,70.633 ; AT89S52.31@108.858,70.624 ccw(c108.858,72.134) 109.926,71.067 ; AT89S52.40@108.904,91.813 cw(c109.273,90.572) 110.189,91.487 ; AT89S52.31@109.379,69.862 cw(c110.876,69.9) 109.817,70.958 ; AT89S52.31@109.633,69.869 cw(c111.692,69.92) 110.236,71.377 ; AT89S52.40@109.637,92.456 ccw(c110.645,92.456) 109.933,91.743 ; v1(115.443,92.456) 117.602,92.456 118.364,93.218 tp3.3@118.364,96.012 ; v1@115.802,92.097 cw(c116.669,91.23) 116.669,92.456 cw(c116.669,93.682) v1@115.802,92.815 ; tp3.3@117.923,95.571 cw(c116.86,94.508) 118.364,94.508 cw(c119.868,94.508) tp3.3@118.805,95.571 ; tp3.3@118.103,95.751 cw(c117.473,95.121) 118.364,95.121 cw(c119.255,95.121) tp3.3@118.625,95.751 ; JP0.9@120.904,70.104 125.349,70.104 127.381,68.072 v1(127.381,65.659) ; JP0.9@121.165,69.843 cw(c121.795,69.213) 121.795,70.104 cw(c121.795,70.995) JP0.9@121.165,70.365 ; JP0.9@121.345,69.663 cw(c122.408,68.6) 122.408,70.104 cw(c122.408,71.608) JP0.9@121.345,70.545 ; JP6.2@125.035,118.805 ccw(c123.972,119.868) 125.476,119.868 ccw(c126.98,119.868) JP6.2@125.917,118.805 ; JP7.2@125.035,121.479 cw(c123.972,120.416) 125.476,120.416 cw(c126.98,120.416) JP7.2@125.917,121.479 ; JP6.2@125.215,118.625 ccw(c124.585,119.255) 125.476,119.255 ccw(c126.367,119.255) JP6.2@125.737,118.625 ; JP7.2@125.215,121.659 cw(c124.585,121.029) 125.476,121.029 cw(c126.367,121.029) JP7.2@125.737,121.659 ; JP6.2@125.476,118.364 JP7.2@125.476,121.92 ; v1@127.022,66.018 ccw(c126.155,66.885) 127.381,66.885 ccw(c128.607,66.885) v1@127.74,66.018 ; DA0832.20@132.081,111.756 DA0832.19@134.621,111.756 DA0832.19@134.621,112.269 ; DA0832.20@132.433,111.404 cw(c133.283,110.554) 133.283,111.756 cw(c133.283,112.958) DA0832.20@132.433,112.108 ; v1@132.991,118.64 cw(c132.124,117.773) 133.35,117.773 cw(c134.576,117.773) v1@133.709,118.64 ; 133.35,111.756 v1(133.35,118.999) ; 133.35,113.157 140.589,113.157 140.97,112.776 140.97,111.252 142.621,109.601 150.368,109.601 151.003,110.236 151.003,112.776 153.416,115.189 v1(157.607,115.189) ; DA0832.19@134.269,111.404 ccw(c133.419,110.554) 133.419,111.756 ccw(c133.419,112.958) DA0832.19@134.269,112.108 ; 18b20.1@146.371,42.231 cw(c145.308,41.168) 146.812,41.168 cw(c148.316,41.168) 18b20.1@147.253,42.231 ; 18b20.1@146.551,42.411 cw(c145.921,41.781) 146.812,41.781 cw(c147.703,41.781) 18b20.1@147.073,42.411 ; 18b20.1@146.812,42.672 146.812,39.751 148.463,38.1 151.892,38.1 153.924,36.068 ; DS1302.1@148.84,66.039 150.496,66.039 152.781,63.754 152.781,50.419 R50.2@153.924,49.276 ; DS1302.1@149.359,65.698 cw(c150.183,64.874) 150.183,66.039 cw(c150.183,67.204) DS1302.1@149.359,66.38 ; 2003.9@149.861,101.596 150.119,101.854 156.21,101.854 156.718,102.362 156.718,109.601 157.353,110.236 160.909,110.236 162.814,108.331 162.814,103.505 166.624,99.695 166.624,73.787 166.283,73.446 ; 2003.9@150.034,101.586 cw(c150.68,100.939) 150.68,101.854 ; 2003.9@150.213,101.406 cw(c151.294,100.326) 151.294,101.854 ; 2003.9@150.213,102.111 ccw(c150.833,102.731) 150.833,101.854 ; R50.2@153.289,49.276 ccw(c151.756,49.276) 152.84,50.36 ccw(c153.924,51.444) R50.2@153.924,49.911 ; R50.2@153.543,49.276 ccw(c152.623,49.276) 153.274,49.926 ccw(c153.924,50.577) R50.2@153.924,49.657 ; D21.1@154.534,35.763 ccw(c153.924,35.306) 153.924,36.068 ; D21.1@154.534,36.373 cw(c153.924,36.83) 153.924,36.068 ; v1(154.686,73.533) 164.075,73.533 motor.2@164.162,73.446 166.283,73.446 ; D21.1@154.94,36.068 153.924,36.068 ; v1@155.045,73.174 cw(c155.912,72.307) 155.912,73.533 cw(c155.912,74.759) v1@155.045,73.892 ; v1@157.248,114.83 ccw(c156.381,113.963) 156.381,115.189 ccw(c156.381,116.415) v1@157.248,115.548 ; Ref.1@158.536,109.832 ccw(c157.561,108.856) 157.561,110.236 ccw(c157.561,111.616) Ref.1@158.536,110.64 ; Ref.1@158.716,110.011 ccw(c158.174,109.469) 158.174,110.236 ccw(c158.174,111.003) Ref.1@158.716,110.461 ; Ref.1@159.292,110.011 cw(c159.834,109.469) 159.834,110.236 cw(c159.834,111.003) Ref.1@159.292,110.461 ; Ref.1@159.472,109.832 cw(c160.447,108.856) 160.447,110.236 cw(c160.447,111.616) Ref.1@159.472,110.64 ; 161.574,73.533 cw(c161.574,70.858) motor.2@163.466,72.749 ; 161.995,73.533 ccw(c161.995,75.614) motor.2@163.466,74.142 ; 162.187,73.533 cw(c162.187,71.471) motor.2@163.645,72.929 ; 162.608,73.533 ccw(c162.608,75) motor.2@163.645,73.963 ; 162.8,73.533 cw(c162.8,72.084) motor.2@163.825,73.109 ; motor.2@164.721,72.974 cw(c165.736,72.118) 165.736,73.446 cw(c165.736,74.774) motor.2@164.721,73.917 ; motor.2@164.915,72.811 cw(c166.283,71.656) 166.283,73.446 ; motor.2@164.915,74.081 ccw(c166.283,75.236) 166.283,73.446 ; 53.848,66.167 ccw(c53.324,66.167) 53.59,66.618 cw(c53.324,66.167) 53.848,66.167 ; 53.848,66.167 cw(c54.372,66.167) 54.106,66.618 ccw(c54.372,66.167) 53.848,66.167 ; 53.848,66.167 54.483,65.532 65.024,65.532 C6.2@66.548,67.056
pads on no net: 2003.1 2003.2 2003.3 2003.14 2003.15 2003.16 dj.1 dj.3 DS1302.8 ISP.3 J61.1 J61.4 J61.5 J61.6 J61.7 J61.8 J61.9 J61.10 J61.11 JP0.2 JP0.3 JP0.5 JP0.7 JP0.8 MAX232.11 MAX232.12 MAX232.13 MAX232.14 P0.2 P0.3 P0.5 P0.7 P0.8 P1.6 P1.7 P1.8 powerkey.3 powerkey.4 reset. S0. S1. S01. S2. S02. S3. S03. S04. S4. S5. S6. S7. S8. S9. S10. S11. S12. S13. S14. S15. USB. USB.2 USB.3
copper on no net: | length 207.6
  Top Layer w0.254: 36.574,128.016 36.578,128.524 ; 38.095,127.747 36.576,128.27 ; 38.105,128.763 36.576,128.27 ; 93.958,127.717 36.576,128.27 ; 111.02,127.553 168.402,127 ; 166.873,126.507 168.402,127 ; 166.883,127.523 168.402,127 ; 168.4,126.746 168.404,127.254 ; 169.557,33.024 170.053,31.496 ; 169.799,31.498 170.307,31.494 ; 170.295,123.956 170.815,125.476 ; 170.369,70.462 170.053,31.496 ; 170.499,86.51 170.815,125.476 ; 170.561,125.478 171.069,125.474 ; 170.573,33.016 170.053,31.496 ; 171.311,123.948 170.815,125.476

## Polygon pours and split planes (outlines as drawn)
no net on Top Layer (hatched 45Degree grid 0.508 track 0.203): 37.541,124.692 168.224,124.692 168.224,31.728 37.541,31.728
no net on Bottom Layer (hatched 45Degree grid 0.508 track 0.203): 37.465,124.882 37.465,31.918 168.148,31.918 168.148,124.882

## Keep-outs
Keep-Out Layer:
  lines w0.6: 36.83,30.988 36.83,124.841 ; 36.83,31.369 101.473,31.369 ; 36.83,125.349 168.402,125.349 168.53,125.349 168.656,31.369 101.346,31.369

## Other copper
Top Layer:
  text "131.832 (mm)" at 94.203,126.801 h1.52 r359.45
  text "93.983 (mm)" at 171.285,70.709 h1.52 r89.54

## Silkscreen, mask and mechanical layers (free items; w line width, h text height)
Top Overlay:
  text "1" at 130.302,121.285 h1.52
  text "20" at 74.422,121.158 h1.52
  text "VCC" at 43.434,119.634 h1.52 r90
  text "GND" at 58.039,119.507 h1.52 r90
  text "16" at 85.725,117.729 h1.52
  text "1" at 130.429,117.475 h1.52
  text "OUT1" at 163.449,112.268 h1.02
  text "OUT2" at 167.767,105.791 h1.02 r90
  text "RFB" at 163.703,102.235 h1.02
  text "1" at 76.454,60.579 h1.52
  text "8" at 54.61,60.452 h1.52
  text "http://www.ourhc.cn" at 91.948,32.766 h1.02

## Text inside footprints (layer, text, board x,y; h text height)
ISP: Top Overlay "10" at 42.164,60.452 h1.27 r90; Top Overlay "9" at 44.704,60.452 h1.27 r90; Top Overlay "1" at 44.704,46.736 h1.27 r90; Top Overlay "2" at 42.164,46.228 h1.27 r90
J61: Top Overlay "6" at 42.059,76.117 h1.5 r90; Top Overlay "9" at 42.059,84.427 h1.5 r90; Top Overlay "5" at 51.459,85.812 h1.5 r90; Top Overlay "1" at 51.459,74.982 h1.5 r90
Q7: Top Overlay "1" at 152.273,94.488 h1.5 r270; Top Overlay "3" at 154.942,94.09 h1.5 r270
Q71: Top Overlay "1" at 143.637,48.895 h1.5; Top Overlay "3" at 143.256,52.07 h1.5